# Altium PCB AlcoholDetectie_V2.PcbDoc
Units mil, origin at the board's own origin, x right, y up, seen from the top; angles counter-clockwise.
Board outline 6000 x 4000 mil, 2 copper layers (Top Layer, Bottom Layer); 29 components, 22 nets, 120 pads, 0 vias.
Unrouted connection lines stored in the file: 56.
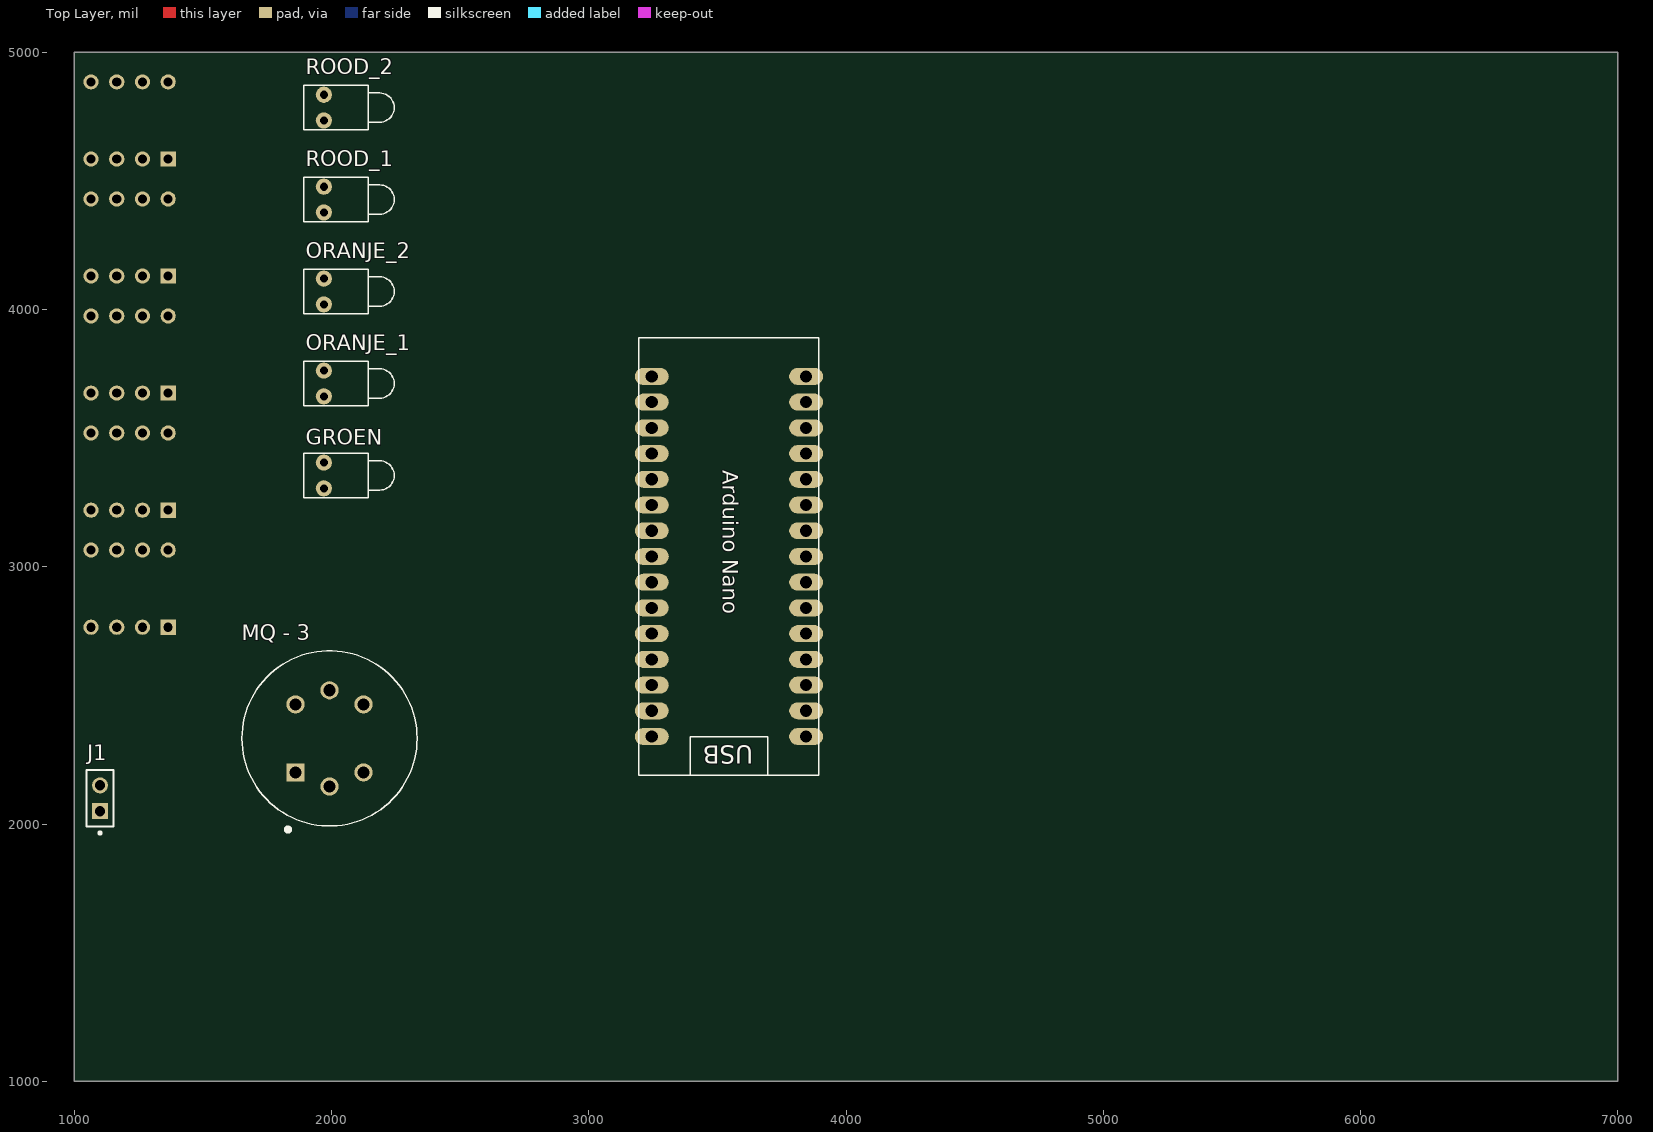
[diagram p0: Top Layer view]
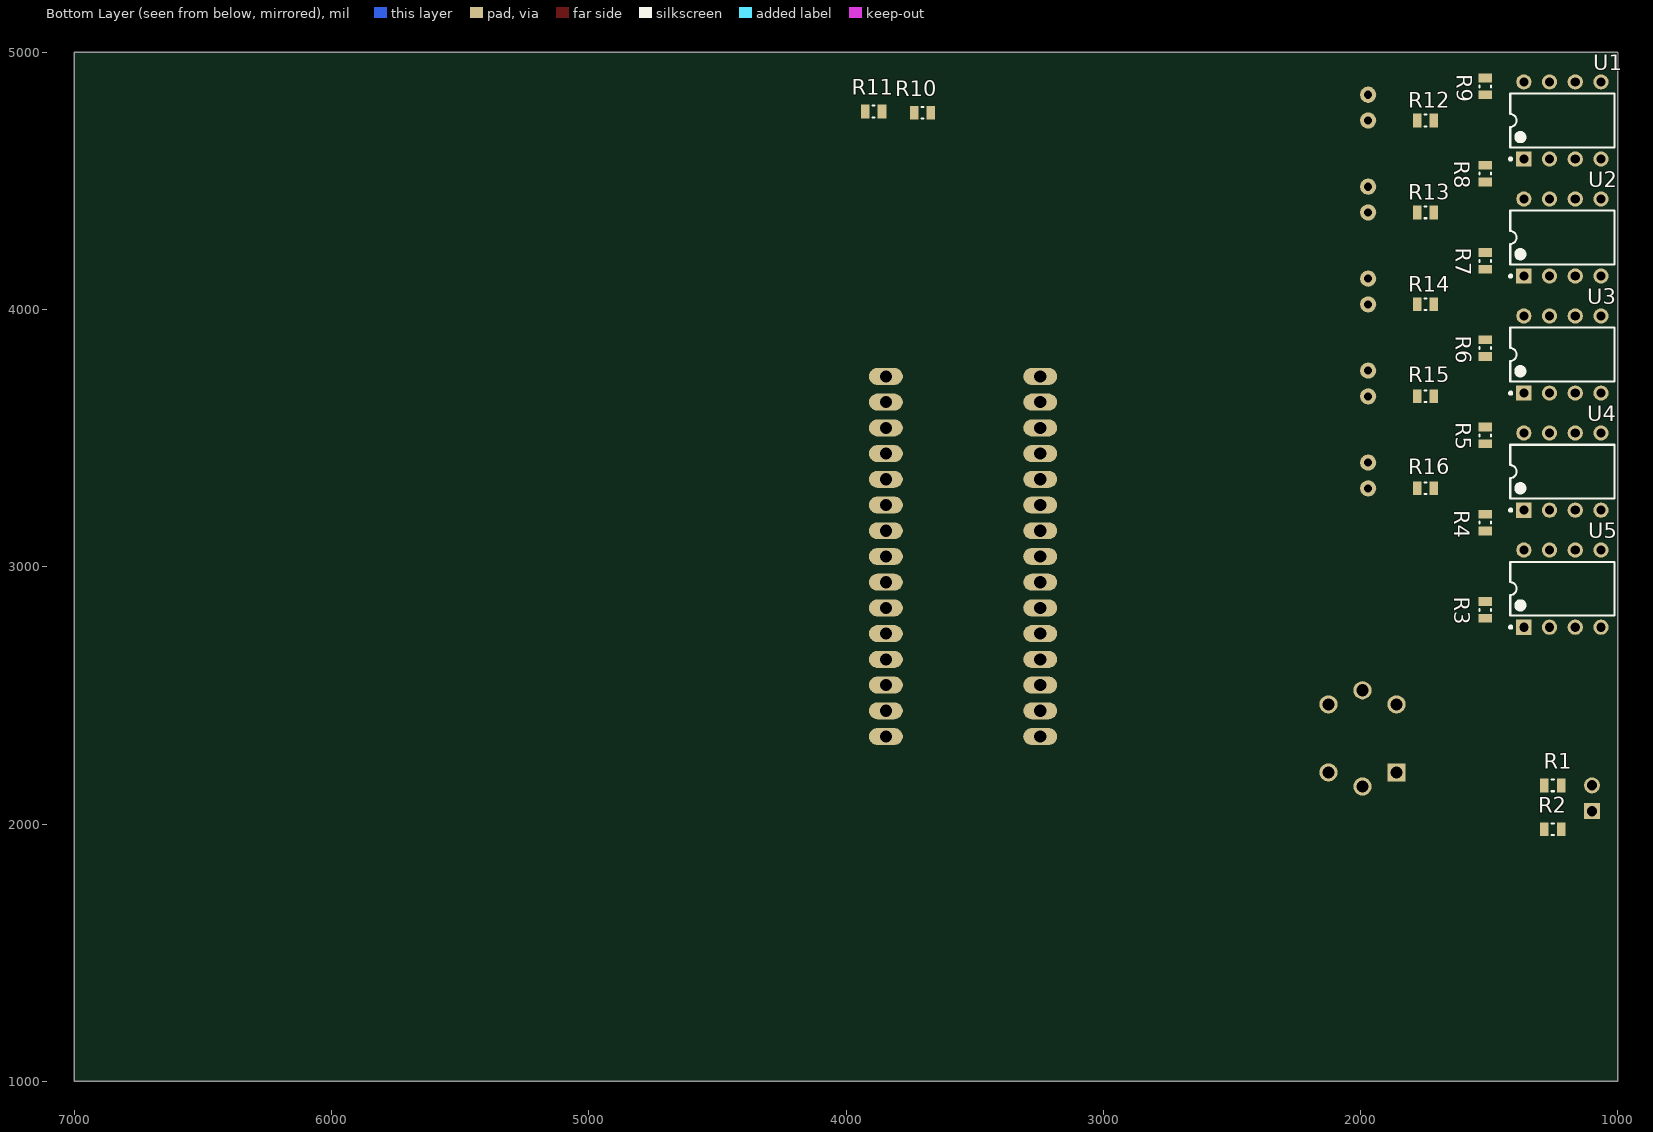
[diagram p1: Bottom Layer view, seen from below]

## Layer stack, top to bottom
Top Solder: solder mask 0.4, Solder Resist, Dk 3.5
Top Layer: signal copper 1.4
Dielectric 1: dielectric 12.6, FR-4, Dk 4.8
Bottom Layer: signal copper 1.4
Bottom Solder: solder mask 0.4, Solder Resist, Dk 3.5

## Board outline
1000,1000 7000,1000 7000,5000 1000,5000

## Design rules (kind name [scope] priority, off if disabled: settings)
Clearance [All] p1: gap=10 ignorepadtopadclearanceinfootprint=FALSE except(0: Arc-Hole Track-Hole SMDPad-Hole THPad-Hole Via-Hole Fill-Hole Poly-Hole Region-Hole Text-Hole)
PolygonConnect [All] p1: connectstyle=Relief reliefconductorwidth=10 reliefentries=4 polygonreliefangle="90 Angle" airgapwidth=10
RoutingVias [All] p1: holewidth=28 width=50 viastyle="Through Hole" minholewidth=28 minwidth=50 maxholewidth=28 maxwidth=50
SolderMaskExpansion [All] p1: expansion=4 istentingtop=FALSE
Width [All] p1: maxlimit=10 minlimit=10 preferedwidth=10
30 further rules are at their usual default settings.

## Components (designator, comment, footprint, x,y, rotation, side; value= is the part's Value field where it differs from the comment)
"Arduino Nano" "ARDUINONANO" PDIP-32 3545,2190 r180 top (schematic designator "ARDUINO NANO")
GROEN "LED1" LED-1 1970,3355 r0 top
J1 "M20-9990246" FP-M20-9990246-MFG 1100,2100 r90 top
"MQ - 3" "SEN-08880" XDCR_SEN-08880 1992.23,2332.77 r90 top
ORANJE_1 "LED2" LED-1 1970,3712.5 r0 top
ORANJE_2 "LED3" LED-1 1970,4070 r0 top
R1 "1k Ω" RESC2013X50X30LL20T20 1252.52,2150 r0 bottom
R2 "5,1 Ω" RESC2013X50X30LL20T20 1252.52,1980 r0 bottom
R3 "1kΩ" RESC2013X50X30LL20T20 1515,2832.52 r90 bottom
R4 "1kΩ" RESC2013X50X30LL20T20 1515,3171.69 r270 bottom
R5 "1kΩ" RESC2013X50X30LL20T20 1515,3510.85 r270 bottom
R6 "1kΩ" RESC2013X50X30LL20T20 1515,3850.02 r90 bottom
R7 "1kΩ" RESC2013X50X30LL20T20 1515,4189.19 r90 bottom
R8 "10kΩ" RESC2013X50X30LL20T20 1515,4528.35 r90 bottom
R9 "300Ω" RESC2013X50X30LL20T20 1515,4867.52 r270 bottom
R10 "800Ω" RESC2013X50X30LL20T20 3702.48,4765 r0 bottom
R11 "1200Ω" RESC2013X50X30LL20T20 3892.48,4770 r180 bottom
R12 "100Ω" RESC2013X50X30LL20T20 1747.48,4735 r0 bottom
R13 "100Ω" RESC2013X50X30LL20T20 1747.48,4377.5 r0 bottom
R14 "100Ω" RESC2013X50X30LL20T20 1747.48,4020 r0 bottom
R15 "100Ω" RESC2013X50X30LL20T20 1747.48,3662.5 r0 bottom
R16 "100Ω" RESC2013X50X30LL20T20 1747.48,3305 r0 bottom
ROOD_1 "LED4" LED-1 1970,4427.5 r0 top
ROOD_2 "LED5" LED-1 1970,4785 r0 top
U1 "LM741J" NAB0008A 1215,4735 r90 bottom
U2 "LM741J" NAB0008A 1215,4280 r90 bottom
U3 "LM741J" NAB0008A 1215,3825 r90 bottom
U4 "LM741J" NAB0008A 1215,3370 r90 bottom
U5 "LM741J" NAB0008A 1215,2915 r90 bottom

## Footprints (in the part's own frame and the unit in brackets; to place one, negate y for a bottom-side part, rotate by r counter-clockwise, add the part's x,y. Pads: shape width x height; smd on the part's side, far side on the other; paste and mask are expansions set on the pad)
FP-M20-9990246-MFG [mm]
  rect 1.57x1.57 hole 1.02 paste-1000 mask+0: 1(-1.27,0)
  round 1.57 hole 1.02 paste-1000 mask+0: 2(1.27,0)
  silkscreen extent -3.55,-1.32 2.79,1.32, body extent -2.89,-1.42 2.89,1.42, height 0.25
LED-1 [mm] "LED; 2 Leads"
  round 1.6 hole 0.8: 1(0,1.27) 2(0,-1.27)
  silkscreen extent -2,-2.2 6.95,2.2
NAB0008A [mm] "DIP, 8-Leads, Body 9.78x6.73mm, Pitch 2.54mm, Row Spacing 7.62mm"
  rect 1.5x1.5 hole 0.9: 1(-3.81,3.81)
  round 1.5 hole 0.9: 2(-3.81,1.27) 3(-3.81,-1.27) 4(-3.81,-3.81) 5(3.81,-3.81) 6(3.81,-1.27) 7(3.81,1.27) 8(3.81,3.81)
  silkscreen extent -3.93,-5.15 2.65,5.24, body extent -3.6,-5.15 3.6,5.15, height 5.08
PDIP-32 [mil]
  oval 132x66 hole 47.24: 3V3(-300,-250) +5V(-300,-1250) A0(-300,-1150) A1(-300,-1050) A2(-300,-950) A3(-300,-850) A4(-300,-750) A5(-300,-650) A6(-300,-550) A7(-300,-450) AREF(-300,-350) D0/RX(300,-1450) D1/TX(300,-1550) D2(300,-1150) D3(300,-1050) D4(300,-950) D5(300,-850) D6(300,-750) D7(300,-650) D8(300,-550) D9(300,-450) D10(300,-350) D11(300,-250) D12(300,-150) D13(-300,-150) GND(300,-1250) GND1(-300,-1450) RESET(300,-1350) RESET1(-300,-1350) VIN(-300,-1550)
  silkscreen extent -350,-1700 350,0
RESC2013X50X30LL20T20 [mm] "Chip Resistor, 2-Leads, Body 2.00x1.25mm, IPC High Density"
  rect 0.85x1.35 smd: 1(-0.825,0) 2(0.825,0)
  silkscreen extent -0.1,-0.58 0.1,0.58, body extent -1.1,-0.72 1.1,0.72, height 0.5
XDCR_SEN-08880 [mm]
  rect 1.8x1.8 hole 1.2: 1(-3.359,3.359)
  round 1.8 hole 1.2: 2(-4.75,0) 3(-3.359,-3.359) 4(3.359,-3.359) 5(4.75,0) 6(3.359,3.359)
  silkscreen extent -9.2,-8.65 8.65,8.65

## Part data
"Arduino Nano": "Arduino; 20MHz; 3.3Ã·5VDC; Flash: 32kB; SRAM: 2kB; ATMEGA328,FT232R", Package=None, Availability="Not in stock", Check_prices=https://www.snapeda.com/parts/ARDUINONANO/Arduino/view-part/7459719/?ref=eda, MF=Arduino, MP=ARDUINONANO, Price=None, SnapEDA_Link=https://www.snapeda.com/parts/ARDUINONANO/Arduino/view-part/7459719/?ref=snap
GROEN: "Typical RED GaAs LED", LatestRevisionDate=08-Jul-2005, LatestRevisionNote="Mech Layer 1 removed.", PackageDescription="LED; 2 Leads", PackageReference=LED-1, Published=8-Jun-2000, Publisher="Altium Limited"
J1: library part CMP-15831-000009-1, "CONN HEADER VERT 2POS 2.54MM", Current Rating=3A, Manufacturer=Harwin, Temperature="-40°C to +105°C", Temperature Range High=+105°C, Temperature Range Low=-40°C, Automotive=No, Category=Conn, ComponentLink2Description=Datasheet, ComponentLink2URL=https://cdn.harwin.com/pdfs/M20-999.pdf, Conn Gender=Male, Conn Orientation=Vertical, Contact Material=Tin,Nickel, Device Class L1=Connectors, Device Class L2="Headers and Wire Housings", Device Class L3=unset, Digikey Description="CONN HEADER VERT 2POS 2.54MM", Height=8.99mm, Lead Free=Yes, Manufacturer Part Number=M20-9990246, Mouser Description="2.54mm (0.1\") Pitch SIL Vertical PC Tail Pin Header, 6.1mm mating pin height, tin, 2 contacts", Number Of Contacts=2, Number Of Rows=1, Octopart=https://octopart.com/m20-9990246-harwin-2590635, Package=M20-9990246, Pitch=2.54mm, RoHS=TRUE
"MQ - 3": "Alcohol _C2H6O_ Sensor 0 V ~ 3.3 V", Package=None, Availability=Unavailable, MF="SparkFun Electronics", MP=SEN-08880, Price=None, SnapEDA_Link=https://www.snapeda.com/parts/SEN-08880/SparkFun%20Electronics/view-part/1160647/?ref=snap
ORANJE_1 ORANJE_2 ROOD_1 ROOD_2: library part LED1, "Typical RED GaAs LED", LatestRevisionDate=08-Jul-2005, LatestRevisionNote="Mech Layer 1 removed.", PackageDescription="LED; 2 Leads", PackageReference=LED-1, Published=8-Jun-2000, Publisher="Altium Limited"
R1 R2 R3 R4 R5 R6 R7 R8 R9 R10 R11 R12 R13 R14 R15 R16: library part CMP-2001-04896-1, Manufacturer="Vishay Dale", Part Number=CRCW08050000Z0EA
U1 U2 U3 U4 U5: library part CMP-0055-00160-3, "Operational Amplifier, 8-pin CerDIP", Manufacturer="Texas Instruments", Package Reference=NAB0008A, PackageTopMarking=NSUZXYTT*LM741J, PowerWise=N, ComponentLink1Description="Datasheet URL", ComponentLink1URL=http://www.ti.com/general/docs/lit/getliterature.tsp?genericPartNumber=LM741&fileType=pdf, CompType=Amplifiers, PackageDescription="Cerdip, .400 x .310in Body, 8 Lead, .300in Centers, .100in Pitch", PinCount=8, RoHS=N

## Nets (pads, with @x,y where several pads share a name; then routed paths per layer and width w, separated by ;. In a path a pad name is that pad's centre, name@x,y a point inside that pad or via, vN(x,y) a via of type N, cw(c..) or ccw(c..) an arc to the next point about the centre after c; other vN are vias at no path point)
+5: "Arduino Nano.+5V" "MQ - 3.1" "MQ - 3.2" "MQ - 3.3"
+15: J1.1 R9.1 R10.1 U1.7 U2.7 U3.7 U4.7 U5.7
GND: "Arduino Nano.GND1" J1.2 R1.1 R2.1 R3.1 R11.1 R12.1 R13.1 R14.1 R15.1 R16.1 U1.4 U2.4 U3.4 U4.4 U5.4
"NetArduino Nano_VIN": "Arduino Nano.VIN" R10.2 R11.2
NetGROEN_1: GROEN.1 U5.6
NetGROEN_2: GROEN.2 R16.2
"NetMQ - 3_4": "MQ - 3.4" "MQ - 3.6" R1.2 U1.3 U2.3 U3.3 U4.3 U5.3
"NetMQ - 3_5": "MQ - 3.5" R2.2
NetORANJE_1_1: ORANJE_1.1 U4.6
NetORANJE_1_2: ORANJE_1.2 R15.2
NetORANJE_2_1: ORANJE_2.1 U3.6
NetORANJE_2_2: ORANJE_2.2 R14.2
NetR3_2: R3.2 R4.1 U5.2
NetR4_2: R4.2 R5.1 U4.2
NetR5_2: R5.2 R6.1 U3.2
NetR6_2: R6.2 R7.1 U2.2
NetR7_2: R7.2 R8.1 U1.2
NetR8_2: R8.2 R9.2
NetR12_2: R12.2 ROOD_2.2
NetR13_2: R13.2 ROOD_1.2
NetROOD_1_1: ROOD_1.1 U2.6
NetROOD_2_1: ROOD_2.1 U1.6
pads on no net: "Arduino Nano.3V3" "Arduino Nano.A0" "Arduino Nano.A1" "Arduino Nano.A2" "Arduino Nano.A3" "Arduino Nano.A4" "Arduino Nano.A5" "Arduino Nano.A6" "Arduino Nano.A7" "Arduino Nano.AREF" "Arduino Nano.D0/RX" "Arduino Nano.D1/TX" "Arduino Nano.D2" "Arduino Nano.D3" "Arduino Nano.D4" "Arduino Nano.D5" "Arduino Nano.D6" "Arduino Nano.D7" "Arduino Nano.D8" "Arduino Nano.D9" "Arduino Nano.D10" "Arduino Nano.D11" "Arduino Nano.D12" "Arduino Nano.D13" "Arduino Nano.GND" "Arduino Nano.RESET1" "Arduino Nano.RESET" U1.1 U1.5 U1.8 U2.1 U2.5 U2.8 U3.1 U3.5 U3.8 U4.1 U4.5 U4.8 U5.1 U5.5 U5.8

## Text inside footprints (layer, text, board x,y; h text height)
"Arduino Nano": Top Overlay "USB" at 3640,2305 h70 r180